# EAGLE board schematic_001 (EAGLE 9.6.2)
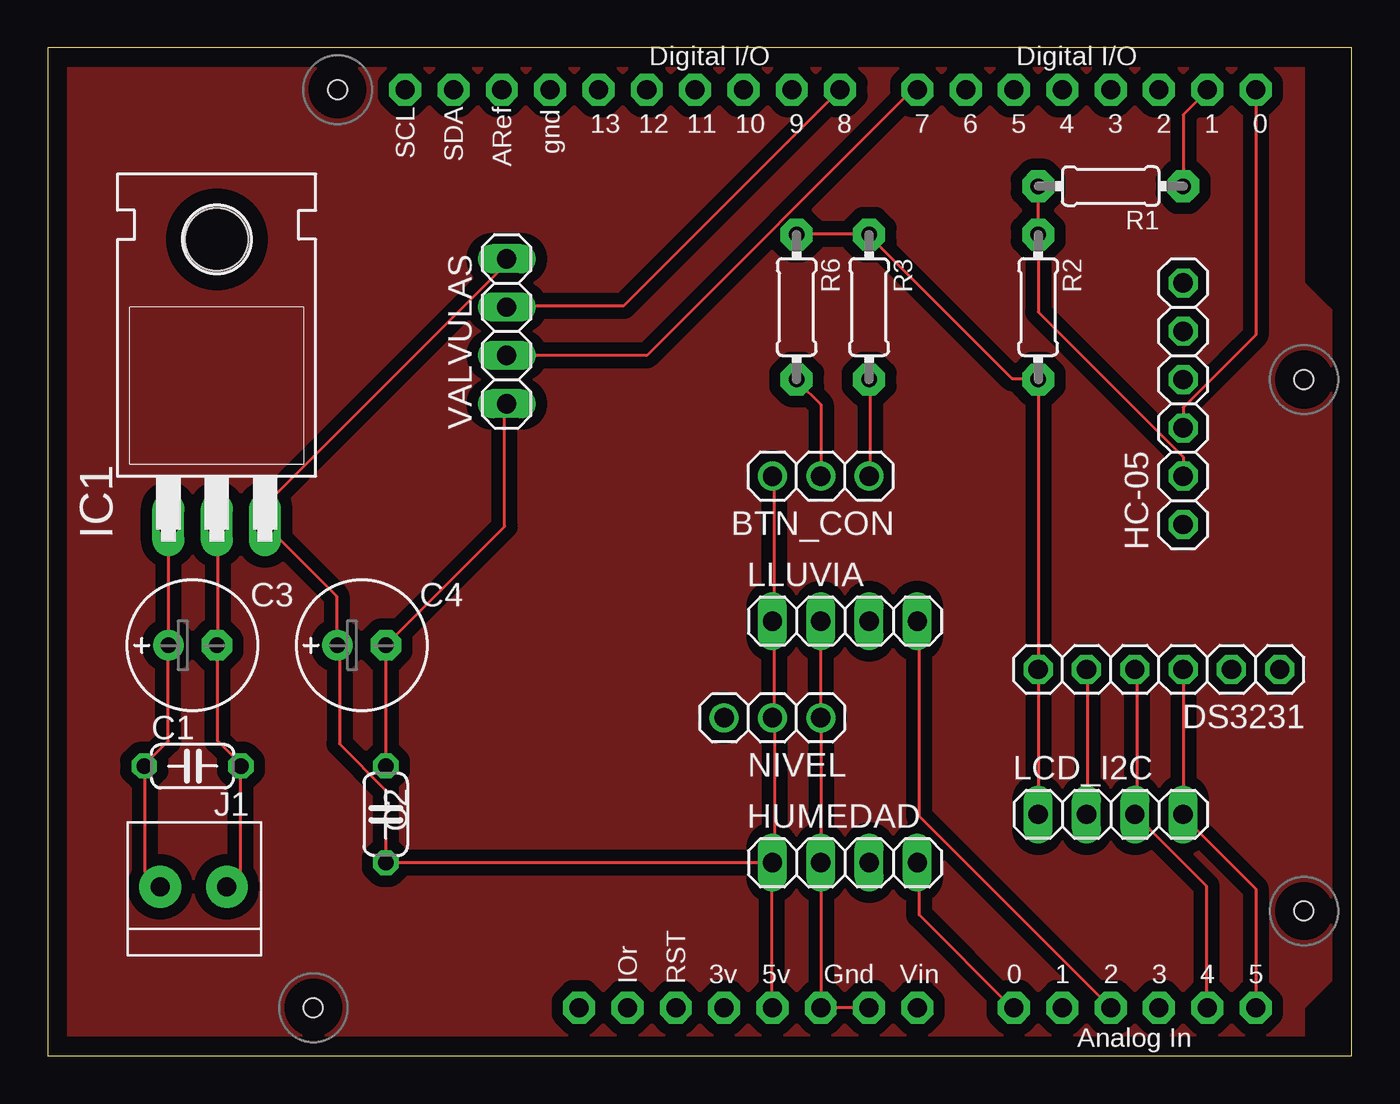
[diagram p0: board, top side]
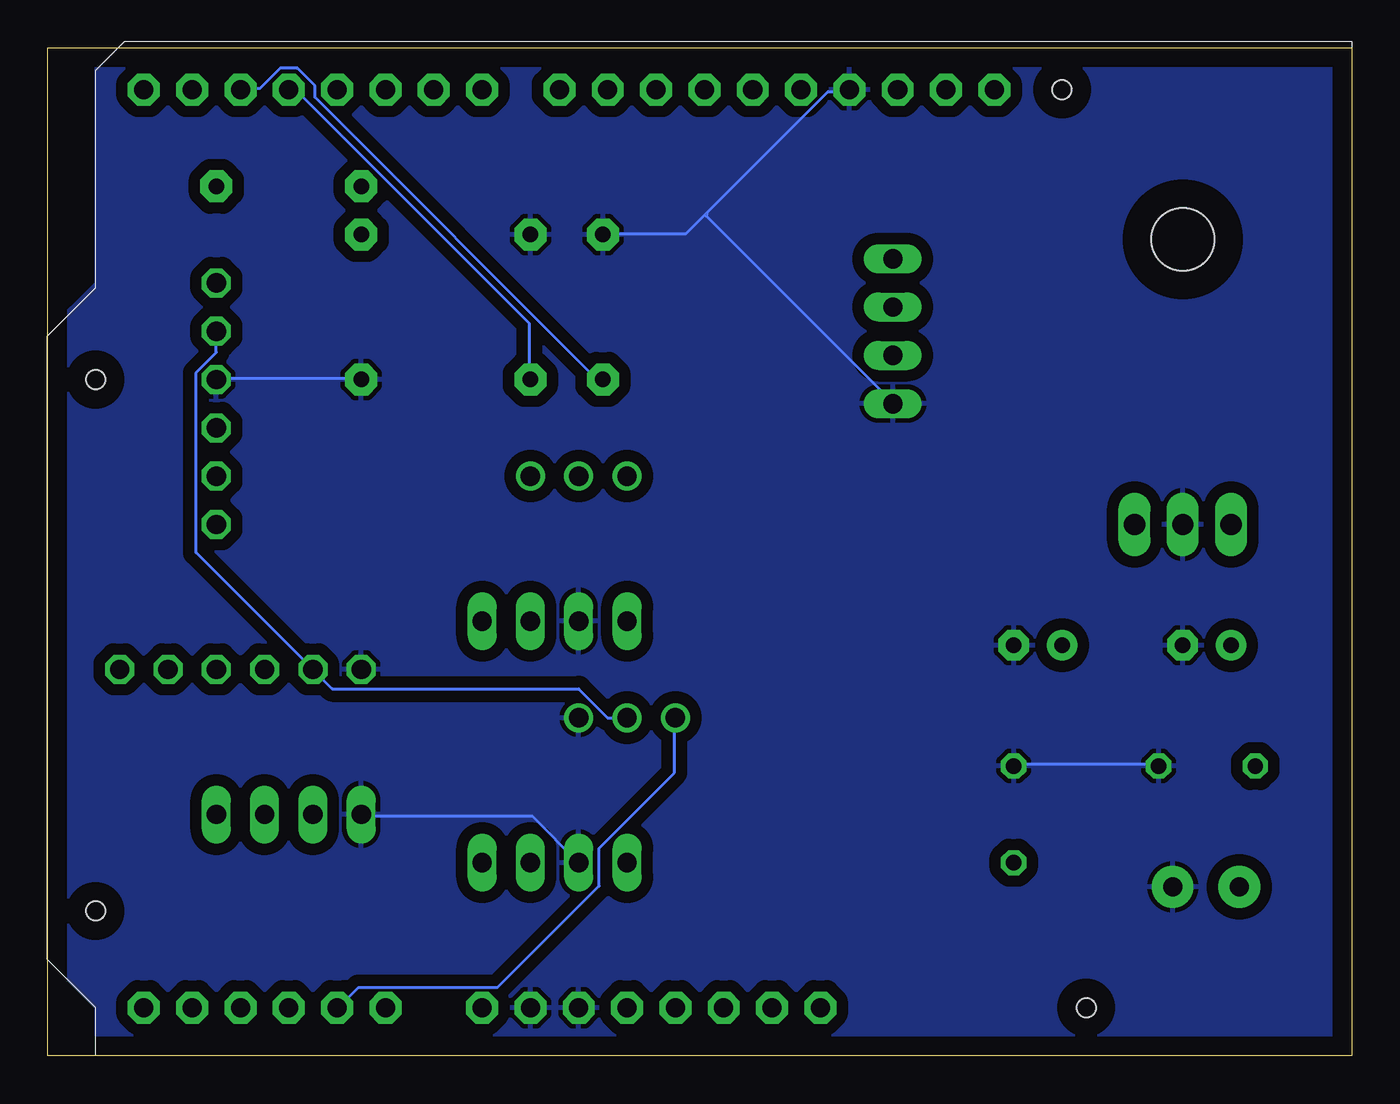
[diagram p1: board, bottom side, seen from below]

Size 68.56 x 53.01 mm. Coordinates in mm from the lower left corner, seen from the top.
Outline: 0,0 68.56,0 68.56,53.01 0,53.01 0,0
Copper layers (1*16): Top 0.035mm / dielectric 1.5mm / Bottom 0.035mm
Design rules "default": minimum track width 6mil, minimum drill 0.35mm, track to track 6mil, track to pad 6mil, pad to pad 6mil, via to via 6mil, smd to smd 6mil, copper to edge 40mil, drill to drill 6mil, minimum pad ring 10mil, minimum via ring 8mil, stop-mask expansion 4mil, vias tented up to drill 0mil, thermal gap 10mil
Holes 1 mm at 15.24,50.8 66.04,35.56 66.04,7.62 13.97,2.54

## Footprints (pad centres in the part's own frame; a part is rotated, then mirrored left to right if it is on the bottom)
1X03 = drill 1.016: 1 -2.54,0; 2 0,0; 3 2.54,0
C050-024X044 = drill 0.813 octagon: 1 -2.54,0; 2 2.54,0
E2,5-7 = drill 0.813 pad 1.6: + -1.27,0 | drill 0.813 pad 1.6 octagon: - 1.27,0
1X06 = drill 1.016 octagon: 1 -6.35,0; 2 -3.81,0; 3 -1.27,0; 4 1.27,0; 5 3.81,0; 6 6.35,0
1X04 = drill 1.016 long: 1 -3.81,0; 2 -1.27,0; 3 1.27,0; 4 3.81,0
TO220H = drill 1.118 long: 1 -2.54,-10.16; 2 0,-10.16; 3 2.54,-10.16 | hole 3.302: 0,4.826
1X2-3.5MM = drill 1 pad 2.184: 1 1.8,0; 2 -1.7,0
0204/7 = drill 0.813 pad 1.676 octagon: 1 -3.81,0; 2 3.81,0
ARDUINOR3-BPLACE = drill 1 pad 1.676 octagon: 3V 35.56,2.54; 5V 38.1,2.54; A0 50.8,2.54; A1 53.34,2.54; A2 55.88,2.54; A3 58.42,2.54; A4 60.96,2.54; A5 63.5,2.54; AREF 23.876,50.8; D0 63.5,50.8; D1 60.96,50.8; D2 58.42,50.8; D3 55.88,50.8; D4 53.34,50.8; D5 50.8,50.8; D6 48.26,50.8; D7 45.72,50.8; D8 41.656,50.8; D9 39.116,50.8; D10 36.576,50.8; D11 34.036,50.8; D12 31.496,50.8; D13 28.956,50.8; GND 26.416,50.8; GND1 43.18,2.54; GND2 40.64,2.54; IOREF 30.48,2.54; RESERVED 27.94,2.54; RESET 33.02,2.54; SCL 18.796,50.8; SDA 21.336,50.8; VIN 45.72,2.54

## Placement (x,y rotation side)
BTN_CON  [1X03]  40.64,30.48 180 top
C1  100n  [C050-024X044]  7.62,15.24 0 top
C2  100n  [C050-024X044]  17.78,12.7 90 top
C3  100u  [E2,5-7]  7.62,21.59 0 top
C4  10u  [E2,5-7]  16.51,21.59 0 top
DS3231  [1X06]  58.42,20.32 180 top
HC-05  [1X06]  59.69,34.29 90 top
HUMEDAD  [1X04]  41.91,10.16 0 top
IC1  7805T  [TO220H]  8.89,38.1 0 top
J1  1X2-3.5MM  [1X2-3.5MM]  7.62,8.89 0 top
LCD_I2C  [1X04]  55.88,12.7 0 top
LLUVIA  [1X04]  41.91,22.86 0 top
NIVEL  [1X03]  38.1,17.78 180 top
R1  1k  [0204/7]  55.88,45.72 180 top
R2  2k  [0204/7]  52.07,39.37 270 top
R3  10k  [0204/7]  43.18,39.37 270 top
R6  10k  [0204/7]  39.37,39.37 270 top
U1  ARDUINOR3-BPLACE  [ARDUINOR3-BPLACE]  0,0 0 top
VALVULAS  [1X04]  24.13,38.1 90 top

## Library data of the parts
BTN_CON DS3231 IC1 J1 NIVEL R1-R3 R6 U1 = daveware_2020
C1-C4 = rcl; SPICEPREFIX: C
HC-05 = daveware_2020; BLUETOOTH: HC-05
HUMEDAD LCD_I2C LLUVIA VALVULAS = pinhead

## Nets
3V: U1.3V
5V: BTN_CON.3 C2.1 C4.+ DS3231.5 HC-05.5 HUMEDAD.1 IC1.3 LCD_I2C.2 LLUVIA.1 NIVEL.2 U1.5V VALVULAS.4
12V: C1.1 C3.+ IC1.1 J1.2
A0: HUMEDAD.4 U1.A0
A1: NIVEL.3 U1.A1
A2: LLUVIA.4 U1.A2
A4: DS3231.4 LCD_I2C.3 U1.A4
A5: DS3231.3 LCD_I2C.4 U1.A5
BTN1: BTN_CON.2 R6.2 U1.D2
BTN2: BTN_CON.1 R3.2 U1.D3
GND: C1.2 C2.2 C3.- C4.- DS3231.6 HC-05.4 HUMEDAD.2 IC1.2 J1.1 LCD_I2C.1 LLUVIA.2 NIVEL.1 R2.2 R3.1 R6.1 U1.GND U1.GND1 U1.GND2 VALVULAS.1
N$2: HC-05.2 R1.2 R2.1
N$3: R1.1 U1.D1
N$4: HC-05.3 U1.D0
N$6: DS3231.1
SQW: DS3231.2
TANQUE: U1.D8 VALVULAS.3
VALVULA: U1.D7 VALVULAS.2
VIN: U1.VIN

## Tracks (layer width: path | path; a pad name or v marks a point on that pad's centre or on a via)
5V
  Top 0.152: VALVULAS.4 24.03,41.86 24.03,41.55 11.53,29.06 11.53,27.99 IC1.3 15.19,24.18 15.19,21.59 C4.+ 15.34,21.59 15.34,16.41 17.78,13.97 C2.1 38.05,10.16 | 38.2,17.78 38.2,10.16 HUMEDAD.1 38.05,10.16 | 38.2,17.78 38.2,22.81 LLUVIA.1 38.2,22.96 38.2,30.43 BTN_CON.3 | 38.2,17.78 NIVEL.2 | 38.05,10.16 38.05,2.54 U1.5V | LCD_I2C.2 54.66,12.75 54.66,20.22 DS3231.5
  Bottom 0.152: HC-05.5 59.69,36.98 60.76,35.92 60.76,26.47 DS3231.5 53.59,19.3 40.64,19.3 39.12,17.78 NIVEL.2
12V
  Top 0.152: IC1.1 C3.+ 6.35,16.56 5.13,15.34 C1.1 5.13,15.19 5.13,9.7 5.89,8.94 J1.2
A0
  Top 0.152: HUMEDAD.4 45.82,10.16 45.82,7.42 50.7,2.54 U1.A0
A1
  Bottom 0.152: NIVEL.3 35.61,17.78 35.61,14.88 39.57,10.92 39.57,8.94 44.91,3.61 52.22,3.61 53.29,2.54 U1.A1
A2
  Top 0.152: U1.A2 45.82,12.6 45.82,22.81 LLUVIA.4
A4
  Top 0.152: DS3231.4 57.25,20.22 57.25,12.75 LCD_I2C.3 60.91,8.94 60.91,2.54 U1.A4
A5
  Top 0.152: DS3231.3 LCD_I2C.4 59.69,12.6 63.5,8.79 U1.A5
BTN1
  Top 0.152: BTN_CON.2 40.64,34.24 39.42,35.46 R6.2
  Bottom 0.152: U1.D2 58.32,50.85 57.4,50.85 56.34,51.92 55.42,51.92 54.51,51 54.51,50.39 39.73,35.61 39.42,35.61 R6.2
BTN2
  Top 0.152: BTN_CON.1 43.23,30.58 43.23,35.46 R3.2
  Bottom 0.152: U1.D3 55.88,50.7 55.42,50.7 43.23,38.51 43.23,35.61 R3.2
GND
  Top 0.152: 8.94,21.59 8.94,27.84 IC1.2 | J1.1 9.55,8.94 10.16,9.55 C1.2 10.16,15.34 8.94,16.56 8.94,21.59 | 8.94,21.59 C3.- | C2.2 C4.- 24.03,27.84 24.03,34.24 VALVULAS.1 | LCD_I2C.1 DS3231.6 R2.2 52.07,35.61 50.7,35.61 43.23,43.08 R3.1 43.08,43.23 39.42,43.23 R6.1 | U1.GND1 U1.GND2 HUMEDAD.2 NIVEL.1 LLUVIA.2
  Bottom 0.152: C1.2 10.16,15.34 17.78,15.34 C2.2 | HUMEDAD.2 43.08,12.6 52.07,12.6 LCD_I2C.1 | HC-05.4 59.69,35.61 52.07,35.61 R2.2 | 33.93,44.3 35,43.23 39.27,43.23 R6.1 | 33.93,44.3 27.53,50.7 26.47,50.7 U1.GND | 33.93,44.3 33.93,44.15 24.18,34.39 VALVULAS.1
  pour Bottom (isolate 0.61): 0,53.34 64.77,53.34 66.04,52.07 66.04,40.64 68.58,38.1 68.58,5.08 66.04,2.54 66.04,0 0,0
N$2
  Top 0.152: HC-05.2 59.69,31.5 52.07,39.12 R2.1 R1.2
N$3
  Top 0.152: R1.1 59.69,49.48 60.91,50.7 U1.D1
N$4
  Top 0.152: HC-05.3 59.69,34.09 63.5,37.9 U1.D0
TANQUE
  Top 0.152: U1.D8 30.28,39.42 24.18,39.42 VALVULAS.3
VALVULA
  Top 0.152: VALVULAS.2 31.5,36.83 45.36,50.7 45.67,50.7 U1.D7
VCC
  pour Top (isolate 0.61): 0,53.34 0,0 66.04,0 66.04,2.54 68.58,5.08 68.58,38.1 66.04,40.64 66.04,52.07 64.77,53.34